# Altium PCB Atmega8a dev board.PcbDoc
Units mm, origin at the board's own origin, x right, y up, seen from the top; angles counter-clockwise.
Board outline 152.4 x 101.6 mm, 2 copper layers (Top Layer, Bottom Layer); 11 components, 30 nets, 80 pads, 10 vias.
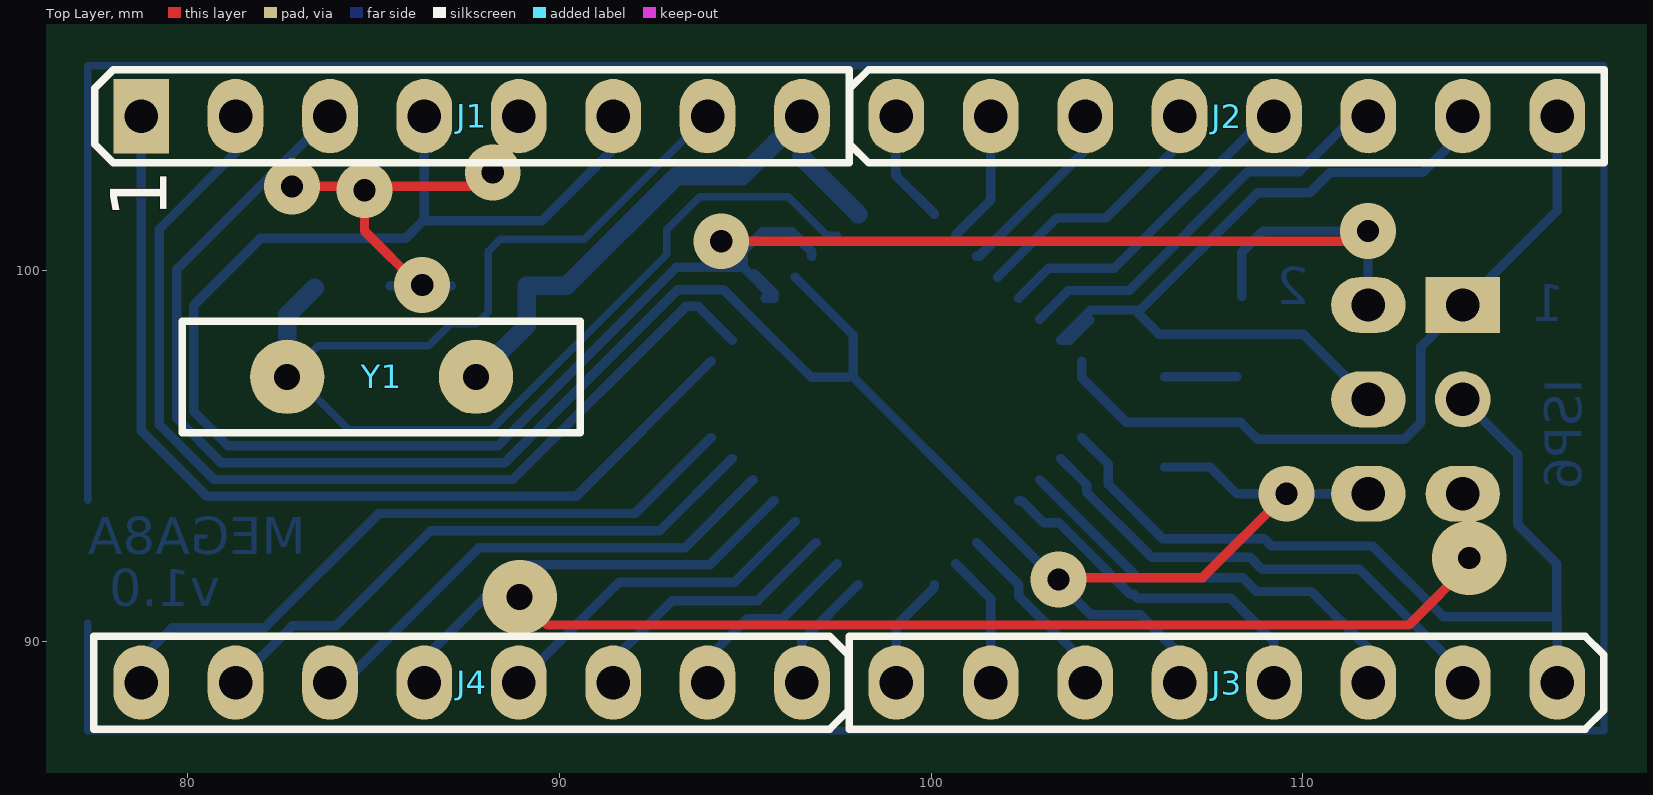
[diagram p0: Top Layer view]
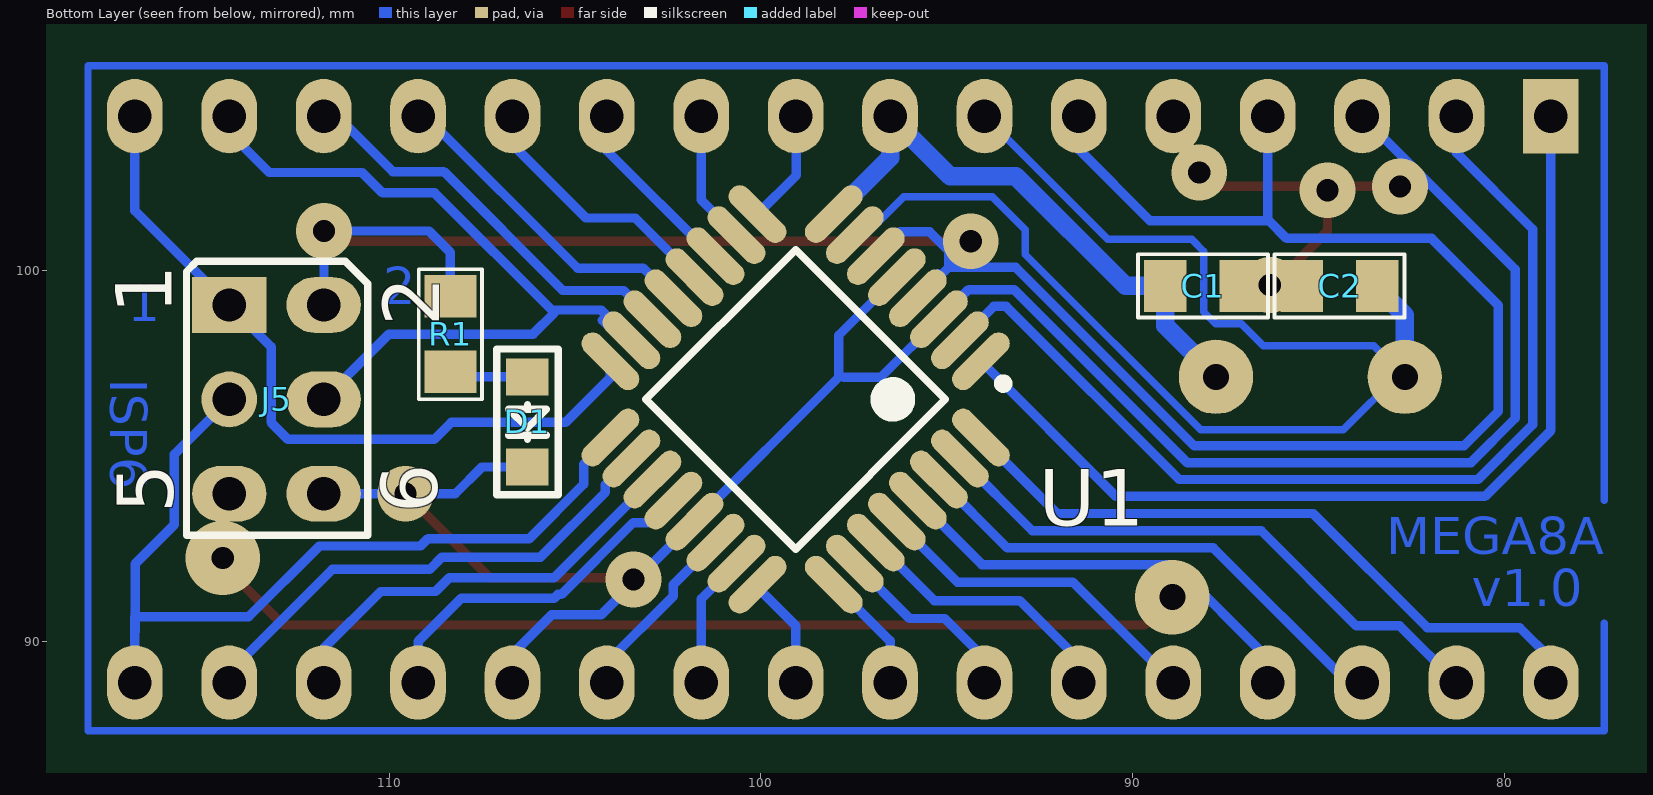
[diagram p1: Bottom Layer view, seen from below]
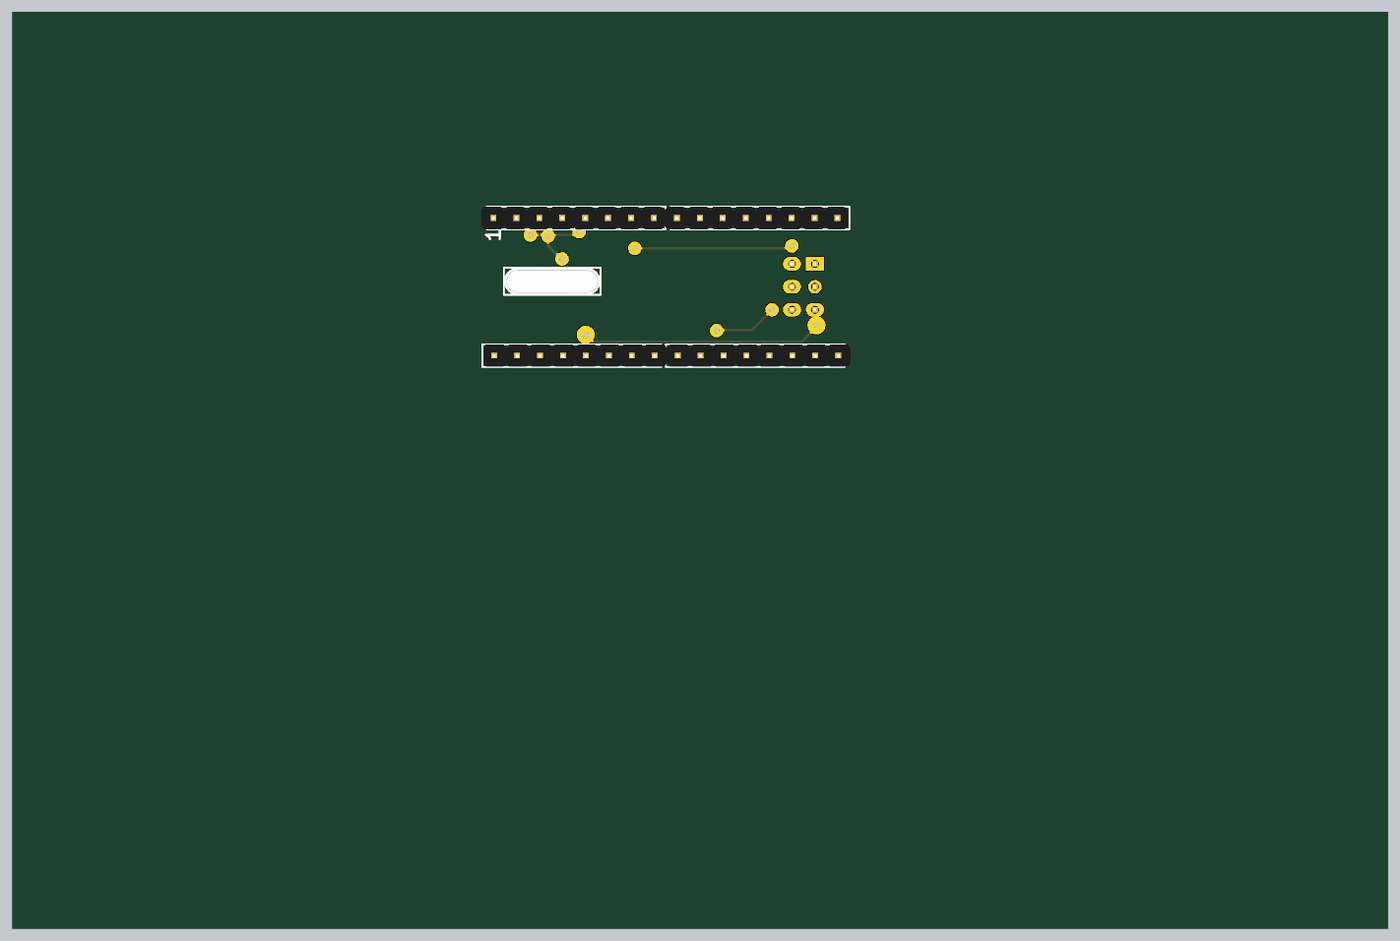
[diagram p2: 3D render of the assembled board from above, using the file's embedded part models]
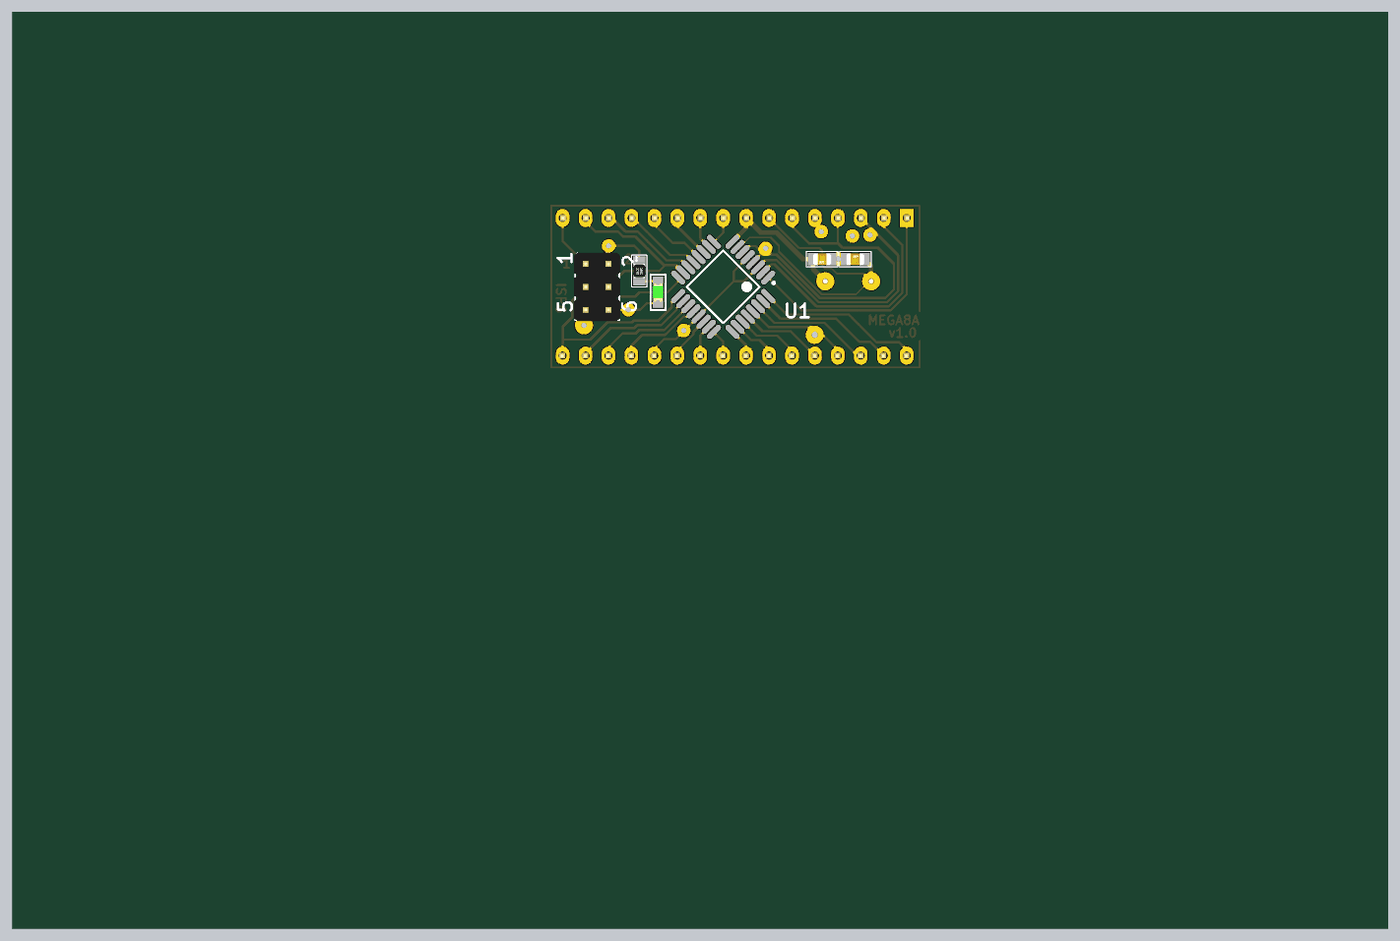
[diagram p3: 3D render of the assembled board from below, using the file's embedded part models]

## Layer stack, top to bottom
Top Solder: solder mask 0.0102, Solder Resist, Dk 3.5
Top Layer: signal copper 0.0356
Dielectric 1: dielectric 0.32, FR-4, Dk 4.8
Bottom Layer: signal copper 0.0356
Bottom Solder: solder mask 0.0102, Solder Resist, Dk 3.5

## Board outline
25.4,25.4 177.8,25.4 177.8,127 25.4,127

## Design rules (kind name [scope] priority, off if disabled: settings)
Clearance [All] p1: gap=0.2
ComponentClearance [All] p1: gap=0 collisioncheckmode=3 verticalgap=0 showdistances=FALSE
PolygonConnect [All] p1: connectstyle=Relief reliefconductorwidth=0.254 reliefentries=4 polygonreliefangle="90 Angle" airgapwidth=0.254
RoutingVias [All] p1: holewidth=0.711 width=1.27 viastyle="Through Hole" minholewidth=0.711 minwidth=1.27 maxholewidth=0.711 maxwidth=1.27
SolderMaskExpansion [All] p1: expansion=0.102
Width [All] p1: maxlimit=2 minlimit=0.2 preferedwidth=0.5
28 further rules are at their usual default settings.

## Components (designator, comment, footprint, x,y, rotation, side; value= is the part's Value field where it differs from the comment)
C1 "22pF" "SMD 0805 (2012)" 87.075,99.6 r0 bottom
C2 "22pF" "SMD 0805 (2012)" 85.45,99.55 r180 bottom
D1 "Green" "LED SMD 0805 Green" 106.275,97.125 r270 bottom
J1 "PLS-8" "Line 2.54 x 8"#1 78.74,104.14 r90 top
J2 "PLS-8" "Line 2.54 x 8"#2 99.06,104.14 r90 top
J3 "PLS-8" "Line 2.54 x 8"#2 116.84,88.9 r270 top
J4 "PLS-8" "Line 2.54 x 8"#2 96.52,88.9 r270 top
J5 "ISP6" "LINE 2.54 x 6D (2 x 3)" 114.3,99.06 r180 bottom
R1 "2.2k Om" "SMD 0805 (2012)" 108.375,99.3 r270 bottom
U1 "ATmega8A-AU" 32A_M 99.06,96.52 r315 bottom
Y1 "12 MHz" "XTAL - 2" 87.75,97.125 r180 top

## Footprints (in the part's own frame and the unit in brackets; to place one, negate y for a bottom-side part, rotate by r counter-clockwise, add the part's x,y. Pads: shape width x height; smd on the part's side, far side on the other; paste and mask are expansions set on the pad)
32A_M [mm] "Thin QFP, 32-Leads, Body 7x7mm, Pitch 0.8mm, IPC Low Density"
  oval 1.95x0.6 smd: 1(-4.25,2.8) 2(-4.25,2) 3(-4.25,1.2) 4(-4.25,0.4) 5(-4.25,-0.4) 6(-4.25,-1.2) 7(-4.25,-2) 8(-4.25,-2.8) 17(4.25,-2.8) 18(4.25,-2) 19(4.25,-1.2) 20(4.25,-0.4) 21(4.25,0.4) 22(4.25,1.2) 23(4.25,2) 24(4.25,2.8)
  oval 0.6x1.95 smd: 9(-2.8,-4.25) 10(-2,-4.25) 11(-1.2,-4.25) 12(-0.4,-4.25) 13(0.4,-4.25) 14(1.2,-4.25) 15(2,-4.25) 16(2.8,-4.25) 25(2.8,4.25) 26(2,4.25) 27(1.2,4.25) 28(0.4,4.25) 29(-0.4,4.25) 30(-1.2,4.25) 31(-2,4.25) 32(-2.8,4.25)
  silkscreen extent -4.37,-2.85 2.85,3.77, body extent -3.5,-3.5 3.5,3.5, height 1.2
"LED SMD 0805 Green" [mm]
  rect 1x1.143 smd: A(0,0) K(2.425,0)
  silkscreen extent -0.75,-0.82 3.17,0.83, body extent 0.22,-0.62 2.24,0.63, height 1.1
"LINE 2.54 x 6D (2 x 3)" [mm]
  rect 2x1.5 hole 0.9: 1(0,0)
  oval 2x1.5 hole 0.9: 2(2.54,0) 4(2.54,-2.54) 5(0,-5.08) 6(2.54,-5.08)
  round 1.5 hole 0.9: 3(0,-2.54)
  silkscreen extent -1.15,-6.2 3.72,1.17, body extent -1.26,-6.36 3.82,1.26, height 8.5
"Line 2.54 x 8"#1 [mm]
  rect 2x1.5 hole 0.9: 1(0,0)
  oval 2x1.5 hole 0.9: 2(0,-2.54) 3(0,-5.08) 4(0,-7.62) 5(0,-10.16) 6(0,-12.7) 7(0,-15.24) 8(0,-17.78)
  silkscreen extent -1.25,-19.05 1.25,1.25, body extent -1.25,-18.91 1.25,1.41, height 8.4
"Line 2.54 x 8"#2 [mm]
  oval 2x1.5 hole 0.9: 1(0,0) 2(0,-2.54) 3(0,-5.08) 4(0,-7.62) 5(0,-10.16) 6(0,-12.7) 7(0,-15.24) 8(0,-17.78)
  silkscreen extent -1.25,-19.05 1.25,1.25, body extent -1.25,-18.91 1.25,1.41, height 8.4
"SMD 0805 (2012)" [mil]
  rect 45x55 smd: 1(0.35,0.98) 2(80.35,0.98)
  silkscreen extent -29,-32 109,34, body extent 1,-24 80,26, height 31
"XTAL - 2" [mm]
  round 2 hole 0.7: 1(0,0) 2(5.08,0)
  silkscreen extent -2.8,-1.5 7.9,1.5, body extent -2.79,-1.52 7.87,1.52, height 3.09

## Part data
C1 C2: library part "Cap SMD 0402-1812", "Capacitor"
D1: library part "Led SMD 0805 Green", "?2v ?20mA"
J1 J2 J3 J4: "Vert, Sgl line, Male"
J5: library part "PLD-6 (2 x 3)", "Vert, Dbl line, Male"
R1: library part "Res All Types"
U1: "8-bit AVR Microcontroller, 8KB Flash, 512 Bytes EEPROM, 1KB SRAM, 32-pin TQFP, Industrial Grade (-40°C to 85°C)"
Y1: library part XTAL, "Crystal Oscillator"

## Via types
v1: diameter 1.5, hole 0.6, Top Layer to Bottom Layer, 8 vias
v2: diameter 2, hole 0.6, Top Layer to Bottom Layer, 1 vias
v3: diameter 2, hole 0.7, Top Layer to Bottom Layer, 1 vias

## Nets (pads, with @x,y where several pads share a name; then routed paths per layer and width w, separated by ;. In a path a pad name is that pad's centre, name@x,y a point inside that pad or via, vN(x,y) a via of type N, cw(c..) or ccw(c..) an arc to the next point about the centre after c; other vN are vias at no path point)
ADC6: J3.3 U1.19 | length 11.6
  Bottom Layer w0.254: U1.19 105.552,91.725 108.375,91.725 108.75,91.35 110.225,91.35 111.76,89.815 J3.3
ADC7: J3.6 U1.22 | length 5
  Bottom Layer w0.254: U1.22 102.348,91.535 102.348,91.229 104.14,89.437 J3.6
AREF: J3.4 U1.20 | length 9.5
  Bottom Layer w0.254: U1.20 102.424,93.798 103.022,93.2 103.435,93.2 105.364,91.271 105.454,91.271 105.55,91.175 108.05,91.175 109.22,90.005 J3.4
AVCC: J3.2 U1.18 | length 13.6
  Bottom Layer w0.254: U1.18 104.183,94.225 104.183,94.017 105.925,92.275 108.575,92.275 108.9,91.95 111.525,91.95 114.3,89.175 J3.2
GND: C1.1 C2.1 D1.K J1.3 J1.5 J3.5 J5.6 U1.3 U1.5 U1.21 | length 70.6
  Top Layer w0.254: v1(82.8,102.25) 87.825,102.25 v1(88.2,102.625) ; v1(84.75,102.15) 84.75,101.05 86.25,99.55 v1(86.3,99.6) ; v1(103.425,91.675) 103.475,91.725 107.3,91.725 v1(109.555,93.98)
  Bottom Layer w0.254: J1.3 79.696,100.016 79.696,96.012 80.889,94.819 88.528,94.819 93.184,99.475 94.408,99.475 U1.3 96.769,97.114 97.771,97.114 ; C2.1 C1.1 ; U1.5 97.9,98.246 97.9,97.114 U1.21 104.293,90.721 105.629,90.721 106.68,89.67 J3.5 ; D1.K 107.5,94.7 108.22,93.98 v1(109.555,93.98) J5.6
MISO: J2.8 J5.1 U1.16 | length 20.2
  Bottom Layer w0.254: U1.16 104.045,97.105 105.25,95.9 108.325,95.9 108.782,95.443 112.718,95.443 113.175,95.9 113.175,97.935 J5.1 116.84,101.6 J2.8
MOSI: J2.7 J5.4 U1.15 | length 21.8
  Bottom Layer w0.254: 104.263,98.65 103.724,98.111 U1.15 104.293,98.925 105.525,98.925 ; J5.4 110.005,98.275 106.125,98.275 105.55,98.85 108.775,102.075 110.175,102.075 110.725,102.625 113.225,102.625 114.3,103.7 J2.7
NetD1_A: D1.A R1.2 | length 1.9
  Bottom Layer w0.254: D1.A R1.2@108.216,97.125
PB0: J2.4 U1.12 | length 7.1
  Bottom Layer w0.254: U1.12 103.374,101.4 104.7,101.4 106.68,103.38 J2.4
PB1: J2.5 U1.13 | length 8.9
  Bottom Layer w0.254: U1.13 103.156,100.05 104.925,100.05 109.015,104.14 J2.5
PB2: J2.6 U1.14 | length 11.1
  Bottom Layer w0.254: U1.14 103.687,99.45 105.325,99.45 108.525,102.65 109.9,102.65 111.39,104.14 J2.6
PB6: C2.2 J1.7 U1.7 Y1.2 | length 36.6
  Bottom Layer w0.2: Y1.2 83.504,97.959 86.475,97.959 87.066,98.55 87.753,98.55 88.075,98.872 88.075,100.5 88.4,100.825 90.657,100.825 93.972,104.14 J1.7 ; Y1.2@82.785,97.24 84.325,95.7 88.163,95.7 92.882,100.418 92.882,101.082 93.775,101.975 96.151,101.975 97.186,100.939 U1.7
  Bottom Layer w0.5: Y1.2 82.67,98.786 C2.2@83.409,99.525
PB7: C1.2 J1.8 U1.8 Y1.1 | length 15.6
  Bottom Layer w0.5: Y1.1 87.75,97.14 89.116,98.506 C1.2 90.185,99.575 93.135,102.525 94.905,102.525 J1.8 96.52,103.02 U1.8
PC0: J3.7 U1.23 | length 3.6
  Bottom Layer w0.254: U1.23 101.6,91.152 J3.7
PC1: J3.8 U1.24 | length 3.1
  Bottom Layer w0.254: J3.8 99.06,90.435 100.085,91.46 U1.24
PC2: J4.1 U1.25 | length 3.3
  Bottom Layer w0.254: J4.1 96.52,90.02 U1.25
PC3: J4.2 U1.26 | length 5.2
  Bottom Layer w0.254: J4.2 93.98,89.555 95.05,90.625 95.993,90.625 U1.26
PC4: J4.3 U1.27 | length 7.4
  Bottom Layer w0.254: J4.3 91.44,89.515 93.025,91.1 95.325,91.1 96.891,92.666 U1.27
PC5: J4.4 U1.28 | length 9.2
  Bottom Layer w0.254: J4.4 91.6,91.6 94.706,91.6 U1.28
PD0: J4.6 U1.30 | length 13.6
  Bottom Layer w0.254: J4.6 84.2,88.9 87.829,92.529 93.372,92.529 U1.30
PD1: J4.7 U1.31 | length 15.9
  Bottom Layer w0.254: J4.7 82.805,90.425 83.975,90.425 86.533,92.983 92.695,92.983 U1.31
PD2: J4.8 U1.32 | length 18.4
  Bottom Layer w0.254: J4.8 78.74,89.54 79.575,90.375 82.062,90.375 85.137,93.45 92.03,93.45 U1.32
PD3: J1.1 U1.1 | length 26
  Bottom Layer w0.254: J1.1 78.74,95.684 80.513,93.911 90.441,93.911 U1.1
PD4: J1.2 U1.2 | length 27.5
  Bottom Layer w0.254: J1.2 81.28,103.155 79.225,101.1 79.225,95.841 80.701,94.365 88.74,94.365 93.396,99.021 93.731,99.021 U1.2
PD5: J2.1 U1.9 | length 3
  Bottom Layer w0.254: J2.1@99.04,104.12 99.04,102.55 U1.9
PD6: J2.2 U1.10 | length 3.4
  Bottom Layer w0.254: U1.10 101.6,101.888 101.6,103.39 J2.2@101.975,103.765
PD7: J2.3 U1.11 | length 4.1
  Bottom Layer w0.254: U1.11 101.299,100.374 J2.3@104.14,103.215
RESET: J4.5 J5.5 U1.29 | length 42.2
  Top Layer w0.254: v3(88.925,91.2) 89.675,90.45 112.85,90.45 114.55,92.15 114.55,91.675 114.475,91.75 v2(114.475,92.25)
  Bottom Layer w0.254: J4.5 86.36,89.56 88.875,92.075 94.049,92.075 U1.29 ; v2(114.475,92.25) 114.475,91.75 114.55,91.675 J5.5@114.55,93.73
SCK: J3.1 J5.3 U1.17 | length 24.2
  Bottom Layer w0.254: U1.17 104.765,94.775 104.765,94.235 106.225,92.775 108.95,92.775 109.15,92.575 111.875,92.575 113.775,90.675 116.84,90.675 J3.1 ; J5.3 115.775,95.045 115.775,93.15 116.825,92.1 116.825,90.275
VCC: J1.4 J1.6 J5.2 R1.1 U1.4 U1.6 | length 66.2
  Top Layer w0.254: v1(94.35,100.775) v1@112,100.775
  Bottom Layer w0.254: J1.4 86.36,101.36 86.325,101.325 ; J1.6 91.44,103.24 89.525,101.325 86.325,101.325 ; U1.4@95.233,99.903 U1.4@95.772,99.365 ; U1.4@95.527,99.242 U1.4 94.939,100.075 ; U1.6@96.781,100.374 96.781,100.496 96.252,101.025 95.45,101.025 94.939,100.514 94.939,100.075 ; R1.1 108.35,100.475 108.925,101.05 v1(111.75,101.05) J5.2@111.75,99.07 ; 86.325,101.325 85.85,100.85 81.95,100.85 80.15,99.05 80.15,96.2 81.077,95.273 88.34,95.273 93.142,100.075 94.939,100.075
copper on no net: | length 114.1
  Bottom Layer w0.2: 77.3,90.5 77.3,90.2 77.3,87.6 118.1,87.6 118.1,105.5 77.3,105.5 77.3,93.8

## Other copper
Bottom Layer:
  text "2" at 110.15,99.075 h1
  text "1" at 117.025,98.625 h1
  text "ISP6" at 117.5,97.075 h1 r90
  text "MEGA8A" at 83.175,92.35 h1
  text "v1.0" at 80.875,90.95 h1

## Text inside footprints (layer, text, board x,y; h text height)
J1: Top Overlay "1" at 79.425,101.375 h1.52 r90
J5: Bottom Overlay "6" at 108.7,93.46 h1.52 r270; Bottom Overlay "5" at 115.8,93.46 h1.52 r270; Bottom Overlay "2" at 108.65,98.485 h1.52 r270; Bottom Overlay "1" at 115.85,98.81 h1.52 r270